# Altium PCB UNI_sensor.PcbDoc
Units mm, origin at the board's own origin, x right, y up, seen from the top; angles counter-clockwise.
Board outline 50 x 30 mm, 2 copper layers (Top Layer, Bottom Layer), stack 1.071 mm thick; 45 components, 28 nets, 151 pads, 26 vias.
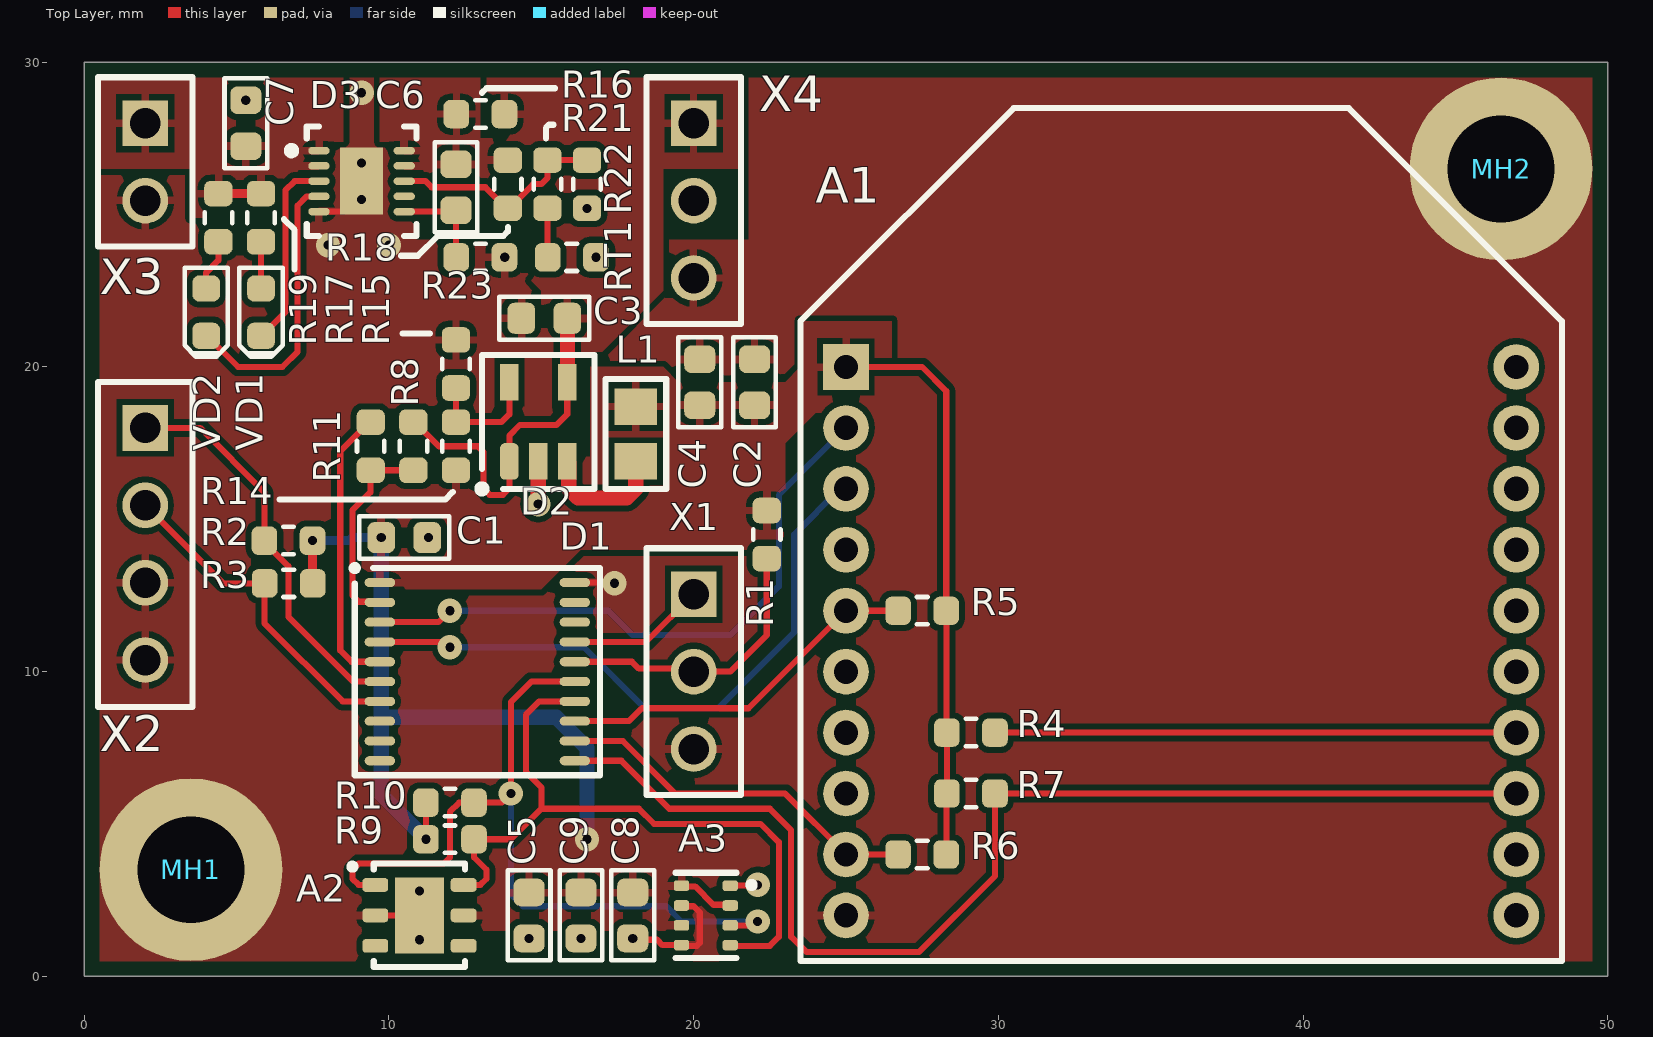
[diagram p0: Top Layer view]
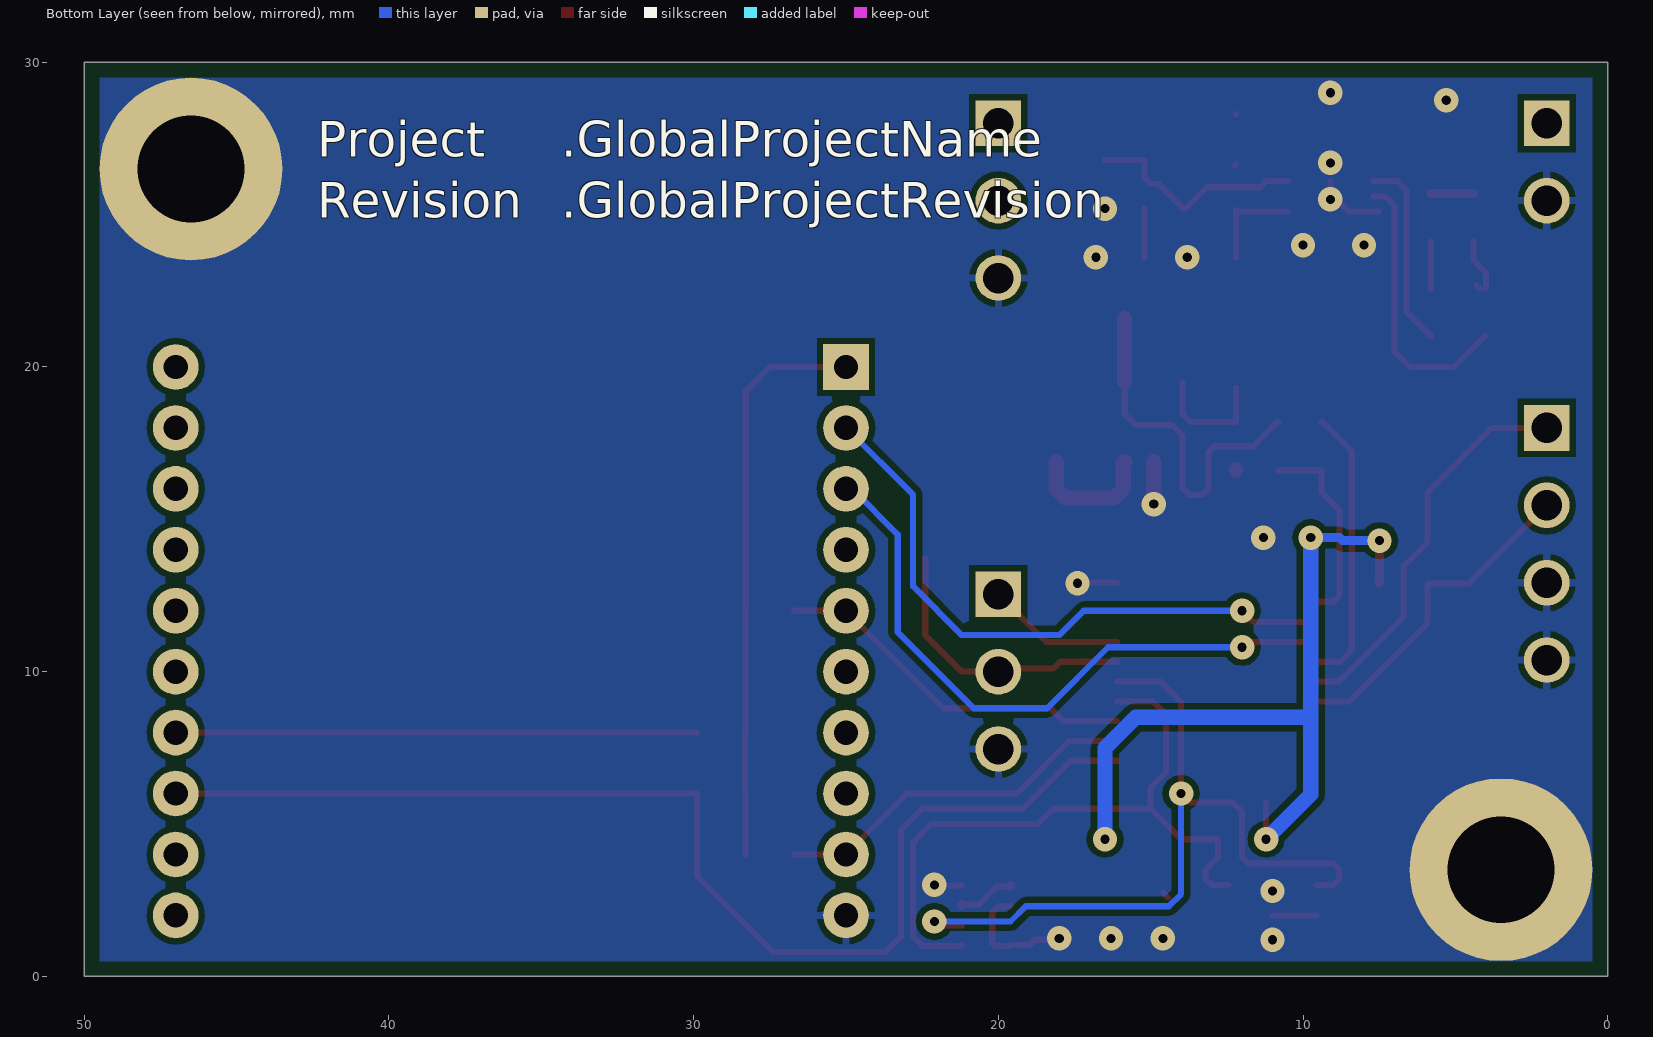
[diagram p1: Bottom Layer view, seen from below]
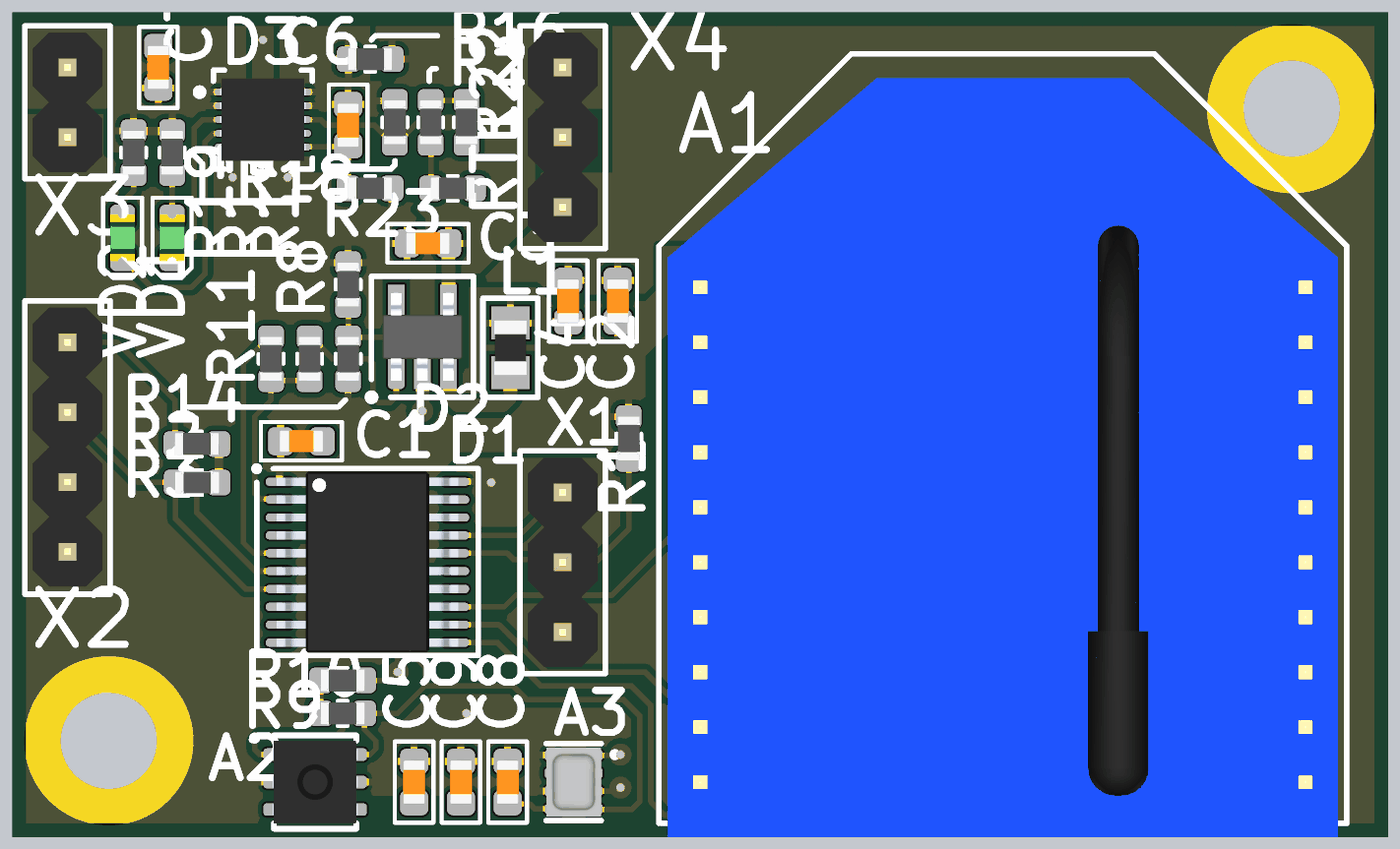
[diagram p2: 3D render of the assembled board from above, using the file's embedded part models]

## Layer stack, top to bottom
Top Solder: solder mask 0.0102, Solder Resist, Dk 3.5
Top Layer: signal copper 0.0356
Dielectric1: core 1, FR-4, Dk 4.8
Bottom Layer: signal copper 0.0356
Bottom Solder: solder mask 0.0102, Solder Resist, Dk 3.5

## Board outline
0,0 50,0 50,30 0,30

## Design rules (kind name [scope] priority, off if disabled: settings)
Clearance polygon [InPolygon] p1: gap=0.2 ignorepadtopadclearanceinfootprint=FALSE except(0: Arc-Hole Track-Hole SMDPad-Hole THPad-Hole Via-Hole Fill-Hole Poly-Hole Region-Hole Text-Hole)
Clearance [All] p2: gap=0.2 ignorepadtopadclearanceinfootprint=FALSE except(0: Arc-Hole Track-Hole SMDPad-Hole THPad-Hole Via-Hole Fill-Hole Poly-Hole Region-Hole Text-Hole)
HoleSize [All] p1: absolutevalues=TRUE maxlimit=10 minlimit=0.3 maxpercent=80.000 minpercent=20.000
HoleToHoleClearance [All] p1: gap=0.5 allowstackedmicrovias=TRUE
MinimumSolderMaskSliver [All] p1: minsoldermaskwidth=0.05
NetAntennae [All] p1: netantennaetolerance=1
PlaneClearance [All] p1: clearance=0.5
PlaneConnect [All] p1: planeconnectstyle=Direct reliefexpansion=0.508 reliefentries=4 reliefconductorwidth=0.254 reliefairgap=0.254
PolygonConnect PolygonConnect_D3_11 [(Id = 'D3-11') Or (Id = 'MH1-1') Or (Id = 'MH2-1')] p1: connectstyle=Direct reliefconductorwidth=0.254 reliefentries=4 polygonreliefangle="90 Angle" airgapwidth=0.254
PolygonConnect [All] p2: thpad.connectstyle=Relief thpad.reliefconductorwidth=0.25 thpad.reliefentries=4 thpad.polygonreliefangle="90 Angle" thpad.airgapwidth=0.2 smdpad.connectstyle=Relief smdpad.reliefconductorwidth=0.25 smdpad.reliefentries=4 smdpad.polygonreliefangle="90 Angle" smdpad.airgapwidth=0.2 via.connectstyle=Direct via.reliefconductorwidth=0.2 via.reliefentries=4 via.polygonreliefangle="90 Angle" via.airgapwidth=0.2
RoutingVias [All] p1: holewidth=0.3 width=0.8 viastyle="Through Hole" minholewidth=0.3 minwidth=0.8 maxholewidth=1.5 maxwidth=2
SilkToSilkClearance [All] p1: silktosilkclearance=0
SilkToSolderMaskClearance SilkscreenOverComponentPads [IsPad] p1: minsilkscreentomaskgap=0 clearancetoexposedcopper=TRUE
SolderMaskExpansion [All] p1: expansion=0.075
Width [All] p1: maxlimit=3 minlimit=0.2 preferedwidth=0.3
22 further rules are at their usual default settings.

## Components (designator, comment, footprint, x,y, rotation, side; value= is the part's Value field where it differs from the comment)
A1 "XBP24CZ7WIT-004" XBEE 36,11 r0 top locked
A2 "SI7021" SI7021 11,2 r0 top
A3 "BMP280" BMP280 20.4,2 r0 top
C1 "C-0603-X7R-16-0.1uF M" CAPC160X80X100L35N 10.5,14.4 r0 top value=0.1uF
C2 "C-0603-X7R-16-0.1uF M" CAPC160X80X100L35N 22,19.5 r90 top value=0.1uF
C3 "C-0603-X7R-16-4.7uF M" CAPC160X80X100L35N 15.1,21.6 r180 top value=4.7uF
C4 "C-0603-X5R-16-10uF M" CAPC160X80X100L35N 20.2,19.5 r90 top value=10uF
C5 "C-0603-X7R-16-0.1uF M" CAPC160X80X100L35N 14.6,2 r270 top value=0.1uF
C6 "C-0603-X7R-16-1uF M" CAPC160X80X100L35N 12.2,25.9 r270 top value=1uF
C7 "C-0603-X7R-16-1uF M" CAPC160X80X100L35N 5.3,28 r90 top value=1uF
C8 "C-0603-X7R-16-0.1uF M" CAPC160X80X100L35N 18,2 r270 top value=0.1uF
C9 "C-0603-X7R-16-0.1uF M" CAPC160X80X100L35N 16.3,2 r270 top value=0.1uF
D1 "MSP430G2553IPW20R" TSSOP-20 12.9,10 r0 top
D2 "TLV62568DBV" SOT23-5 14.9,18.2 r90 top
D3 "BQ24010DRCR" "QFN-11 (3x3)" 9.1,26.1 r0 top
L1 "LQM21PN2R2MC0D" L0805_BLM21 18.1,17.8 r90 top value=2.2uH
MH1 "Testpoint" MHole_3.5_6mm 3.5,3.5 r0 top locked
MH2 "Testpoint" MHole_3.5_6mm 46.5,26.5 r0 top locked
R1 "R-0603-10K F" RESC160X80X55L30N 22.4,14.5 r90 top value=10k
R2 "R-0603-47K F" RESC160X80X55L30N 6.7,14.3 r0 top value=47k
R3 "R-0603-47K F" RESC160X80X55L30N 6.71,12.9 r0 top value=47k
R4 "R-0603-0R F" RESC160X80X55L30N 29.1,8 r0 top value=0
R5 "R-0603-47K F" RESC160X80X55L30N 27.5,12 r0 top value=47k
R6 "R-0603-47K F" RESC160X80X55L30N 27.5,4 r0 top value=47k
R7 "R-0603-47K F" RESC160X80X55L30N 29.1,6 r180 top value=47k
R8 "R-0603-47K F" RESC160X80X55L30N 10.8,17.4 r90 top value=47k
R9 "R-0603-10K F" RESC160X80X55L30N 12,4.5 r180 top value=10k
R10 "R-0603-10K F" RESC160X80X55L30N 12,5.7 r180 top value=10k
R11 "R-0603-47K F" RESC160X80X55L30N 9.4,17.4 r270 top value=47k
R14 "R-0603-100K F" RESC160X80X55L30N 12.2,17.4 r270 top value=100k
R15 "R-0603-22K F" RESC160X80X55L30N 12.2,20.1 r270 top value=22k
R16 "R-0603-0R F" RESC160X80X55L30N 13,28.3 r180 top value=0
R17 "R-0603-1K F" RESC160X80X55L30N 5.8,24.9 r270 top value=1k
R18 "R-0603-47K F" RESC160X80X55L30N 13.9,26 r90 top value=47k
R19 "R-0603-1K F" RESC160X80X55L30N 4.4,24.9 r270 top value=1k
R21 "R-0603-0R F" RESC160X80X55L30N 15.2,26 r90 top value=0
R22 "R-0603-47K F" RESC160X80X55L30N 16.5,26 r90 top value=47k
R23 "R-0603-2K F" RESC160X80X55L30N 13,23.6 r180 top value=2k
RT1 "RT-B57330V2103F260" RESC160X80X55L30N 16,23.6 r0 top value=10k
VD1 "LED-0603-R" LEDC1608X60N 5.8,21.8 r90 top
VD2 "LED-0603-G" LEDC1608X60N 4,21.8 r90 top
X1 "PLS-3" PLS3 20,12.54 r180 top
X2 "PLS-4" PLS4 2,18 r180 top
X3 "PLS-2" PLS2 2,28 r180 top locked
X4 "PLS-3" PLS3 20,28 r180 top locked

## Footprints (in the part's own frame and the unit in brackets; to place one, negate y for a bottom-side part, rotate by r counter-clockwise, add the part's x,y. Pads: shape width x height; smd on the part's side, far side on the other; paste and mask are expansions set on the pad)
BMP280 [mm]
  rrect50% 0.5x0.35 smd: 1(0.8,0.975) 2(0.8,0.325) 3(0.8,-0.325) 4(0.8,-0.975) 5(-0.8,-0.975) 6(-0.8,-0.325) 7(-0.8,0.325) 8(-0.8,0.975)
  silkscreen extent -1,-1.4 1.6,1.4, body extent -1,-1.25 1,1.25, height 1
CAPC160X80X100L35N [mm] "Capacitor, Chip; 1.60 mm L X 0.80 mm W X 1.00 mm H body"
  rrect51% 0.91x1.02 smd: 1(-0.755,0) 2(0.755,0)
  silkscreen extent -1.48,-0.7 1.48,0.7, body extent -0.8,-0.4 0.8,0.4, height 1
L0805_BLM21 [mm] "BLM21"
  rect 1.2x1.4 smd paste+0 mask+0.075: 1(-0.9,0) 2(0.9,0)
  silkscreen extent -1.8,-1 1.8,1, body extent -1,-0.6 1,0.6, height 0.95
LEDC1608X60N [mm] "LEDC1608X60N"
  rrect51% 0.857x0.907 smd: 1(-0.775,0) 2(0.775,0)
  silkscreen extent -1.46,-0.71 1.46,0.71, body extent -0.85,-0.45 0.85,0.45, height 0.9
MHole_3.5_6mm [mm]
  round 6 hole 3.5: 1(0,0)
PLS2 [mm] "1x2 2.54mm"
  rect 1.5x1.5 hole 1 mask+0.075: 1(0,0)
  round 1.5 hole 1 mask+0.075: 2(0,2.54)
  silkscreen extent -1.55,-1.51 1.55,4.05, body extent -1.27,-1.27 1.27,3.81, height 8.55
PLS3 [mm] "1x3 2.54mm"
  rect 1.5x1.5 hole 1 mask+0.075: 1(0,0)
  round 1.5 hole 1 mask+0.075: 2(0,2.54) 3(0,5.08)
  silkscreen extent -1.55,-1.51 1.55,6.59, body extent -1.27,-1.27 1.27,6.35, height 8.55
PLS4 [mm] "1x4 2.54mm"
  rect 1.5x1.5 hole 1 mask+0.075: 1(0,0)
  round 1.5 hole 1 mask+0.075: 2(0,2.54) 3(0,5.08) 4(0,7.62)
  silkscreen extent -1.55,-1.51 1.55,9.17, body extent -1.27,-1.27 1.27,8.89, height 8.55
"QFN-11 (3x3)" [mm] "CASE"
  oval 0.7x0.25 smd mask+0.05: 1(-1.4,1) 2(-1.4,0.5) 3(-1.4,0) 4(-1.4,-0.5) 5(-1.4,-1) 6(1.4,-1) 7(1.4,-0.5) 8(1.4,0) 9(1.4,0.5) 10(1.4,1)
  rect 1.4x2.2 smd: 11(0,0)
  silkscreen extent -2.42,-1.8 1.8,1.8, body extent -1.55,-1.5 1.55,1.5, height 1
RESC160X80X55L30N [mm] "Resistor, Chip; 1.60 mm L X 0.80 mm W X 0.55 mm H body"
  rrect50% 0.84x0.93 smd mask+0.05: 1(-0.79,0) 2(0.79,0)
  silkscreen extent -0.18,-0.45 0.18,0.45, body extent -0.8,-0.4 0.8,0.4, height 0.55
SI7021 [mm]
  rrect50% 0.85x0.45 smd: 1(-1.45,1) 2(-1.45,0) 3(-1.45,-1) 4(1.45,-1) 5(1.45,0) 6(1.45,1)
  rect 1.6x2.5 smd: 7(0,0)
  silkscreen extent -2.3,-1.7 1.5,1.7, body extent -1.55,-1.5 1.55,1.5, height 0.8
SOT23-5 [mm]
  rrect50% 1.2x0.6 smd mask+0.075: 1(-1.3,0.95)
  rect 1.2x0.6 smd mask+0.075: 2(-1.3,0) 3(-1.3,-0.95) 4(1.3,-0.95) 5(1.3,0.95)
  silkscreen extent -2.32,-1.85 2.2,1.97, body extent -1.6,-1.45 1.6,1.45, height 0.94
TSSOP-20 [mm] "TSSOP-20"
  oval 1x0.3 smd mask+0.075: 1(-3.2,2.925) 2(-3.2,2.275) 3(-3.2,1.625) 4(-3.2,0.975) 5(-3.2,0.325) 6(-3.2,-0.325) 7(-3.2,-0.975) 8(-3.2,-1.625) 9(-3.2,-2.275) 10(-3.2,-2.925) 11(3.2,-2.925) 12(3.2,-2.275) 13(3.2,-1.625) 14(3.2,-0.975) 15(3.2,-0.325) 16(3.2,0.325) 17(3.2,0.975) 18(3.2,1.625) 19(3.2,2.275) 20(3.2,2.925)
  silkscreen extent -4.12,-3.4 4.02,3.5, body extent -3.3,-3.3 3.3,3.3, height 1.2
XBEE [mm]
  rect 1.5x1.5 hole 0.8: 1(-11,9)
  round 1.5 hole 0.8: 2(-11,7) 3(-11,5) 4(-11,3) 5(-11,1) 6(-11,-1) 7(-11,-3) 8(-11,-5) 9(-11,-7) 10(-11,-9) 11(11,-9) 12(11,-7) 13(11,-5) 14(11,-3) 15(11,-1) 16(11,1) 17(11,3) 18(11,5) 19(11,7) 20(11,9)
  silkscreen extent -12.5,-10.5 12.5,17.5, body extent -12.19,-11 12.19,16.61, height 11.9

## Part data
A1: library part XBP24CZ7WIT, "XBee Module", Manufacturer=Digi, Component_Type=Микромодуль, Mount_Type=Manual, Partnumber=XBP24CZ7WIT-004, UID=A-XBP24CZ7WIT-004
A2: "I2C HUMIDITY AND TEMPERATURE SENSOR", Manufacturer="Silicon Labs", Component_Type=Датчик, Mount_Type=Auto, Partnumber=SI7021, UID=A-SI7021
A3: "Digital Pressure Sensor", Manufacturer="Bosch Sensortec", Component_Type=Датчик, Mount_Type=Auto, Partnumber=BMP280, UID=A-BMP280
C1 C2 C3 C4 C5 C6 C7 C8 C9: library part C, "General capacitor", Manufacturer=Murata, Tolerance=20%, Voltage=16V, Component_Type=Конденсатор, Mount_Type=Auto, Size=0603
  C1 C2 C5 C8 C9: PnP_Name="C-0603-X7R-16-0.1uF M", TC=X7R, UID="C-0603-X7R-16-0.1uF M"
  C3: PnP_Name="C-0603-16-4.7uF M", TC=X7R, UID="C-0603-X7R-16-4.7uF M"
  C4: PnP_Name="C-0603-X5R-16-10uF M", TC=X5R, UID="C-0603-X5R-16-10uF M"
  C6 C7: PnP_Name="C-0603-X7R-16-1uF M", TC=X7R, UID="C-0603-X7R-16-1uF M"
D1: "16-bit microcontroller", Manufacturer="Texas Instruments", Component_Type=Микросхема, Mount_Type=Auto, Partnumber=MSP430G2553IPW20R, PnP_Name=D-MSP430G2553IPW20R, UID=D-MSP430G2553IPW20R
D2: "1-A High Efficiency Synchronous Buck Converterin SOT Package", Manufacturer="Texas Instruments", Component_Type=Микросхема, Mount_Type=Auto, Partnumber=TLV62568DBV, UID=D-TLV62568DBV
D3: library part BQ24010, "Single-Chip, Li-Ion Charge Management IC for Handheld Applications (bqTINY™)", Manufacturer="Texas Instruments", Component_Type=Микросхема, Mount_Type=Auto, Partnumber=BQ24010DRCR, PnP_Name=D-BQ24010DRCR, UID=D-BQ24010DRCR
L1: library part L, "General inductor", Manufacturer=Murata, MaxCurrent=600mA, Tolerance=20%, Component_Type="Катушка индуктивности", Mount_Type=Auto, Partnumber=LQM21PN2R2MC0D, Size=0805, UID=L-LQM21PN2R2MC0D
MH1 MH2: library part Test_point, "Test point"
R1 R2 R3 R5 R6 R7 R8 R9 R10 R11 R14 R15 R17 R18 R19 R22 R23: library part R, "General resistor", Manufacturer=Yageo, Tolerance=1%, Component_Type=Резистор, Mount_Type=Auto, Size=0603, TC=-
  R1 R9 R10: PnP_Name="R-0603-10K F", UID="R-0603-10K F"
  R2 R3 R5 R6 R7 R8 R11: PnP_Name="R-0603-47K F", UID="R-0603-47K F"
  R14: PnP_Name="R-0603-100K F", UID="R-0603-100K F"
  R15: PnP_Name="R-0603-22K F", UID="R-0603-22K F"
  R17 R19: PnP_Name="R-0603-1K F", UID="R-0603-1K F"
  R18 R22: DoNotPlace=DNP, PnP_Name="R-0603-47K F", UID="R-0603-47K F"
  R23: PnP_Name="R-0603-2K F", UID="R-0603-2K F"
R4 R16 R21: library part R, "General resistor", Manufacturer=Yageo, Tolerance=-, Component_Type=Резистор, Mount_Type=Auto, PnP_Name="R-0603-0R F", Size=0603, TC=-, UID="R-0603-0R F"
  R21: DoNotPlace=DNP
RT1: library part R_T, "Thermistor", Manufacturer=Epcos, Partnumber=B57330V2103F260, Tolerance=1%, Component_Type=Терморезистор, Mount_Type=Auto, PnP_Name=RT-B57330V2103F260, Size=0603, TC=NTC, UID=RT-B57330V2103F260
VD1: library part LED, "LED", Color=Red, Component_Type=Индикатор, Size=0603, UID=LED-0603-R
VD2: library part LED, "LED", Color=Green, Component_Type=Индикатор, Size=0603, UID=LED-0603-G
X1 X4: library part Conn_3, Manufacturer=KLS, Component_Type=Разъём, Mount_Type=Manual, Partnumber=PLS-3, UID=X-PLS-3
X2: library part Conn_4, Manufacturer=-, Component_Type=Разъём, Mount_Type=Manual, Partnumber=PLS-4, UID=X-PLS-4
X3: library part Conn_2, Manufacturer=KLS, Component_Type=Разъём, Mount_Type=Manual, Partnumber=PLS-2, UID=X-PLS-2

## Via types
v1: diameter 0.8, hole 0.3, Top Layer to Bottom Layer, tented both sides, 26 vias

## Nets (pads, with @x,y where several pads share a name; then routed paths per layer and width w, separated by ;. In a path a pad name is that pad's centre, name@x,y a point inside that pad or via, vN(x,y) a via of type N, cw(c..) or ccw(c..) an arc to the next point about the centre after c; other vN are vias at no path point)
CHRG_IN: C7.1 D3.1 D3.2 R17.1 R19.1 X3.1 | length 1.4
  Top Layer w0.3: R19.1 R17.1
DSENSOR-1: D1.6 R2.1 X2.1 | length 13.1
  Top Layer w0.2: X2.1 3.8,18 5.91,15.89 R2.1 5.91,14.255 6.7,13.465 6.7,11.8 8.825,9.675 D1.6
DSENSOR-2: D1.7 R3.1 X2.2 | length 11.1
  Top Layer w0.2: X2.2 4.56,12.9 R3.1 5.92,11.58 8.475,9.025 D1.7
GND: A1.10 A2.2 A2.7 A3.1 A3.5 A3.7 C1.2 C2.2 C3.2 C4.2 C5.2 C7.2 C8.2 C9.2 D1.20 D2.2 D3.5 D3.11 MH1.1 MH2.1 R15.1 R22.1 R23.1 RT1.2 X1.3 X2.3 X2.4 X3.2 X4.3 | length 11.9
  Top Layer w0.2: v1(5.3,28.755) C7.2@5.3,28.8 ; D3.5@7.5,25.1 D3.5 8.5,25.1 9.1,25.7 D3.11 ; A2.2 A2.7 ; C1.2 v1(11.3,14.4) ; R23.1 v1(13.8,23.6) ; D1.20 17.375,12.925 v1(17.4,12.9) ; C9.2@16.3,1.1 v1(16.3,1.245) ; v1(16.5,25.2) R22.1 ; RT1.2 v1(16.8,23.6) ; C8.2@18,1 v1(18,1.245) 18.045,1.2 18.8,1.2 18.975,1.025 A3.5 19.625,1 20.1,1 20.2,1.1 20.2,2.1 20,2.3 19.625,2.3 A3.7 ; A3.1 22.075,2.975 v1(22.1,3)
  Top Layer w0.5: v1(14.9,15.5) D2.2
  other v1: 11,1.2 14.6,1.245 11,2.8 8,24 10,24 9.1,25.5 9.1,26.7 9.1,29
I2C_SCL: A2.6 A3.4 D1.14 R9.1 | length 23.1
  Top Layer w0.2: A2.6 13,3 13.2,3.2 13.2,3.5 12.79,3.91 R9.1 14,4.5 15,5.5 ; D1.14 14.925,9.025 14.5,8.6 14.5,6.7 15,6.2 15,5.5 ; A3.4 21.225,1 22.5,1 22.8,1.3 22.8,4.4 22.2,5 18.7,5 18.2,5.5 15,5.5
I2C_SDA: A2.1 A3.3 D1.15 R10.1 | length 26.6
  Top Layer w0.2: A2.1 9,3 8.8,3.2 8.8,3.5 9,3.7 11.8,3.7 12,3.9 12,5.4 12.3,5.7 R10.1 13.7,5.7 v1(14,6) 14,9 14.675,9.675 D1.15 ; A3.3 21.775,1.675 21.9,1.8 v1(22.1,1.8)
  Bottom Layer w0.2: v1(14,6) 14,2.7 14.4,2.3 19.1,2.3 19.6,1.8 v1@21.9,1.8 ; v1(22.1,1.8) v1@21.9,1.8 ; v1@22.1,2 v1@21.9,1.8
MCU_RXD: A1.2 D1.3 | length 20.4
  Top Layer w0.2: D1.3 11.625,11.625 v1(12,12)
  Bottom Layer w0.2: v1(12,12) 17.2,12 18,11.2 21.2,11.2 22.8,12.8 22.8,15.8 A1.2
MCU_TXD: A1.3 D1.4 | length 21.1
  Top Layer w0.2: D1.4 11.663,10.975 11.838,10.8 v1(12,10.8)
  Bottom Layer w0.2: v1(12,10.8) 16.4,10.8 18.4,8.8 20.8,8.8 23.3,11.3 23.3,14.5 24.8,16 A1.3
MCU_VCC: A1.1 A2.5 A3.2 A3.6 A3.8 C1.1 C2.1 C4.1 C5.1 C8.1 C9.1 D1.1 L1.2 R1.2 R2.2 R3.2 R4.1 R5.2 R6.2 R7.2 R9.2 R10.2 R14.2 | length 46.6
  Top Layer w0.2: v1(11.21,4.5) R10.2 ; C5.1@14.435,2.59 C5.1 ; A3.8@19.625,2.95 20.05,2.95 20.65,2.35 A3.2@21.175,2.35 ; A1.1 27.5,20 28.29,19.21 R5.2 28.3,11.99 28.3,8.01 R4.1 R7.2 28.3,5.99 28.3,4.01 R6.2
  Top Layer w0.3: v1(7.49,14.3) 7.495,14.295 7.495,12.905 R3.2 ; C1.1@9.645,14.4 v1(9.745,14.4) ; A3.8 A3.8@19.625,2.95 ; A3.2@21.175,2.35 A3.2
  Bottom Layer w0.3: v1(7.49,14.3) 8.7,14.3 8.8,14.4 v1(9.745,14.4)
  Bottom Layer w0.5: v1(9.745,14.4) 9.745,8.5 ; v1(11.21,4.5) 9.745,5.965 9.745,8.5 ; v1(16.5,4.5) 16.5,7.5 15.5,8.5 9.745,8.5
NetA1_14: A1.14 R4.2 | length 17.1
  Top Layer w0.2: R4.2 A1.14
NetC6_1: C6.1 D3.9 D3.10 R16.2 R18.2 | length 0.1
  Top Layer w0.2: C6.1@12.205,26.66 C6.1 C6.1@12.255,26.6 ; R16.2@12.205,28.295 R16.2
NetC6_2: C6.2 D3.6 R23.2 | length 3.3
  Top Layer w0.2: D3.6 10.51,25.11 12.165,25.11 C6.2 12.205,25.14 12.205,23.605 R23.2
NetD2_3: D2.3 L1.1 | length 4.3
  Top Layer w0.5: D2.3 15.9,16.85 15.9,16 16.2,15.7 17.8,15.7 18.1,16 L1.1
NetD2_5: D2.5 R14.1 R15.2 | length 4
  Top Layer w0.2: R15.2 R14.1 13.69,18.19 13.95,18.45 D2.5
NetD3_3: D3.3 VD1.1 | length 6.3
  Top Layer w0.2: VD1.1 5.825,21.025 6.6,21.8 6.6,25.8 6.9,26.1 D3.3
NetD3_4: D3.4 VD2.1 | length 9.2
  Top Layer w0.2: VD2.1@4.025,21.025 5.05,20 6.5,20 7,20.5 7,25.3 7.3,25.6 D3.4
NetR17_2: R17.2 VD1.2 | length 1.5
  Top Layer w0.2: VD1.2 R17.2
NetR19_2: R19.2 VD2.2 | length 1.8
  Top Layer w0.2: VD2.2 4,23.1 4.4,23.5 R19.2 ; VD2.2@4.2,22.575 VD2.2@4.3,22.675
NetR21_1: R21.1 RT1.1 | length 1.6
  Top Layer w0.2: R21.1 15.205,25.205 15.205,23.605 RT1.1
RF_RSTN: A1.5 D1.13 R5.1 | length 12.1
  Top Layer w0.2: D1.13 17.875,8.375 18.3,8.8 21.8,8.8 A1.5 R5.1
RF_SLEEP: A1.9 D1.12 R6.1 | length 12.2
  Top Layer w0.2: D1.12 17.675,7.725 19.4,6 23,6 A1.9 R6.1
RF_STS: A1.13 D1.11 R7.1 | length 39.3
  Top Layer w0.2: D1.11 17.625,7.075 19.2,5.5 22.5,5.5 23.2,4.8 23.2,1.3 23.7,0.8 27.4,0.8 29.89,3.29 R7.1 A1.13
SWTCK: D1.17 X1.1 | length 4.5
  Top Layer w0.2: D1.17 18.435,10.975 X1.1
SWTDIO: D1.16 R1.1 X1.2 | length 9.4
  Top Layer w0.2: D1.16 17.975,10.325 18.2,10.1 19.9,10.1 X1.2 21.2,10 22.4,11.2 R1.1
TS: D3.8 R18.1 R21.2 R22.2 | length 7.4
  Top Layer w0.2: D3.8 11.2,26.1 11.4,25.9 13.165,25.9 13.855,25.21 R18.1 13.945,25.21 14.735,26 15,26 15.2,26.2 R21.2 R22.2
VBAT: C3.1 D2.1 D2.4 R8.2 R16.1 X4.1 | length 12
  Top Layer w0.2: R8.2 10.845,18.19 11.635,17.4 12.913,17.4 13.1,17.213 13.1,16 13.3,15.8 13.733,15.8 13.95,16.017 D2.1 13.95,17.75 14.3,18.1 15.5,18.1 15.85,18.45 D2.4 D2.4@15.855,19.505
  Top Layer w0.5: D2.4@15.855,19.505 C3.1
VBAT_ADC: D1.2 R8.1 R11.2 | length 6.8
  Top Layer w0.2: D1.2 9.681,12.294 9.006,12.294 8.8,12.5 8.8,15.3 9.39,15.89 9.39,16.6 R11.2 R8.1
VBAT_KEY: D1.5 R11.1 | length 9.4
  Top Layer w0.2: R11.1 9.355,18.19 8.4,17.235 8.4,10.7 8.775,10.325 D1.5
pads on no net: A1.4 A1.6 A1.7 A1.8 A1.11 A1.12 A1.15 A1.16 A1.17 A1.18 A1.19 A1.20 A2.3 A2.4 D1.8 D1.9 D1.10 D1.18 D1.19 D3.7 X4.2

## Polygon pours and split planes (outlines as drawn)
GND on Top Layer "Top Layer-GND" (solid, remove dead copper, pour order 20): 0.5,26.5 0.5,0.5 49.5,0.5 49.5,29.5 21.8,29.5 21.8,24.175 10.9,24.175 10.9,29.5 8.5,29.5 8.5,27.4 7.6,26.5
MCU_VCC on Top Layer "Top Layer-MCU_VCC 1" (solid, pour order 8): 16.6,20 19,20 19.5,19.5 23,19.5 23.5,20 23.5,21.5 26.5,21.5 26.5,18.5 24,18.5 23,17.5 23,14 16.3,14 15,12.7 8.8,12.7 8.8,15.5 10.35,17.05 16.6,17.05
MCU_VCC on Top Layer "Top Layer-MCU_VCC" (solid, pour order 10): 13.5,5.3 22.5,5.3 22.5,1.8 22.2,1.5 12.4,1.5 12.4,4.2
VBAT on Top Layer "Top Layer-VBAT" (solid, pour order 6): 13,29.5 21.5,29.5 21.5,26.5 19,26.5 19,22.5 17,20.5 15,20.5 15,22.5 13,24.5
NetC6_1 on Top Layer "Top Layer-NetC6_1" (solid, pour order 4): 9.7,29.5 9.7,26.3 11.3,26.3 11.6,26 14.5,26 14.5,27.5 13,27.5 13,29.5
CHRG_IN on Top Layer "CHRG_IN_L01_P002" (solid, remove dead copper, pour order 2): 8.5,29.5 8.5,26.1 6.5,26.1 6.5,24.9 3.5,24.9 3.5,26.5 0.5,26.5 0.5,29.5
no net on Top Layer "Top Layer-No Net" (solid, pour order 0): 0.4,29.6
GND on Bottom Layer "Bottom Layer-GND" (solid, remove dead copper, pour order 14): 0.5,0.5 49.5,0.5 49.5,29.5 0.5,29.5

## Silkscreen, mask and mechanical layers (free items; w line width, h text height)
Top Overlay:
  lines w0.2: 6.4,15.65 11.85,15.65 12.1,15.9 ; 6.55,24.85 6.9,24.5 6.9,23.2 ; 10.4,23.65 10.95,23.65 11.6,24.3 13.75,24.3 13.9,24.45 13.9,24.6 ; 10.45,21.1 11.35,21.1 ; 13.05,29 13.2,29.15 15.45,29.15 ; 15.15,27.5 15.15,27.85 15.25,27.95 15.4,27.95
Bottom Overlay:
  text ".GlobalProjectName" at 34.35,26.5 h2
  text "Project" at 42.35,26.5 h2
  text ".GlobalProjectRevision" at 34.35,24.5 h2
  text "Revision" at 42.35,24.5 h2
Mechanical 1:
  the board outline again, w0.2